# Altium PCB PCB1.PcbDoc
Units mm, origin at the board's own origin, x right, y up, seen from the top; angles counter-clockwise.
Board outline 87.38 x 72.52 mm, 2 copper layers (Top Layer, Bottom Layer); 23 components, 15 nets, 94 pads, 2 vias.
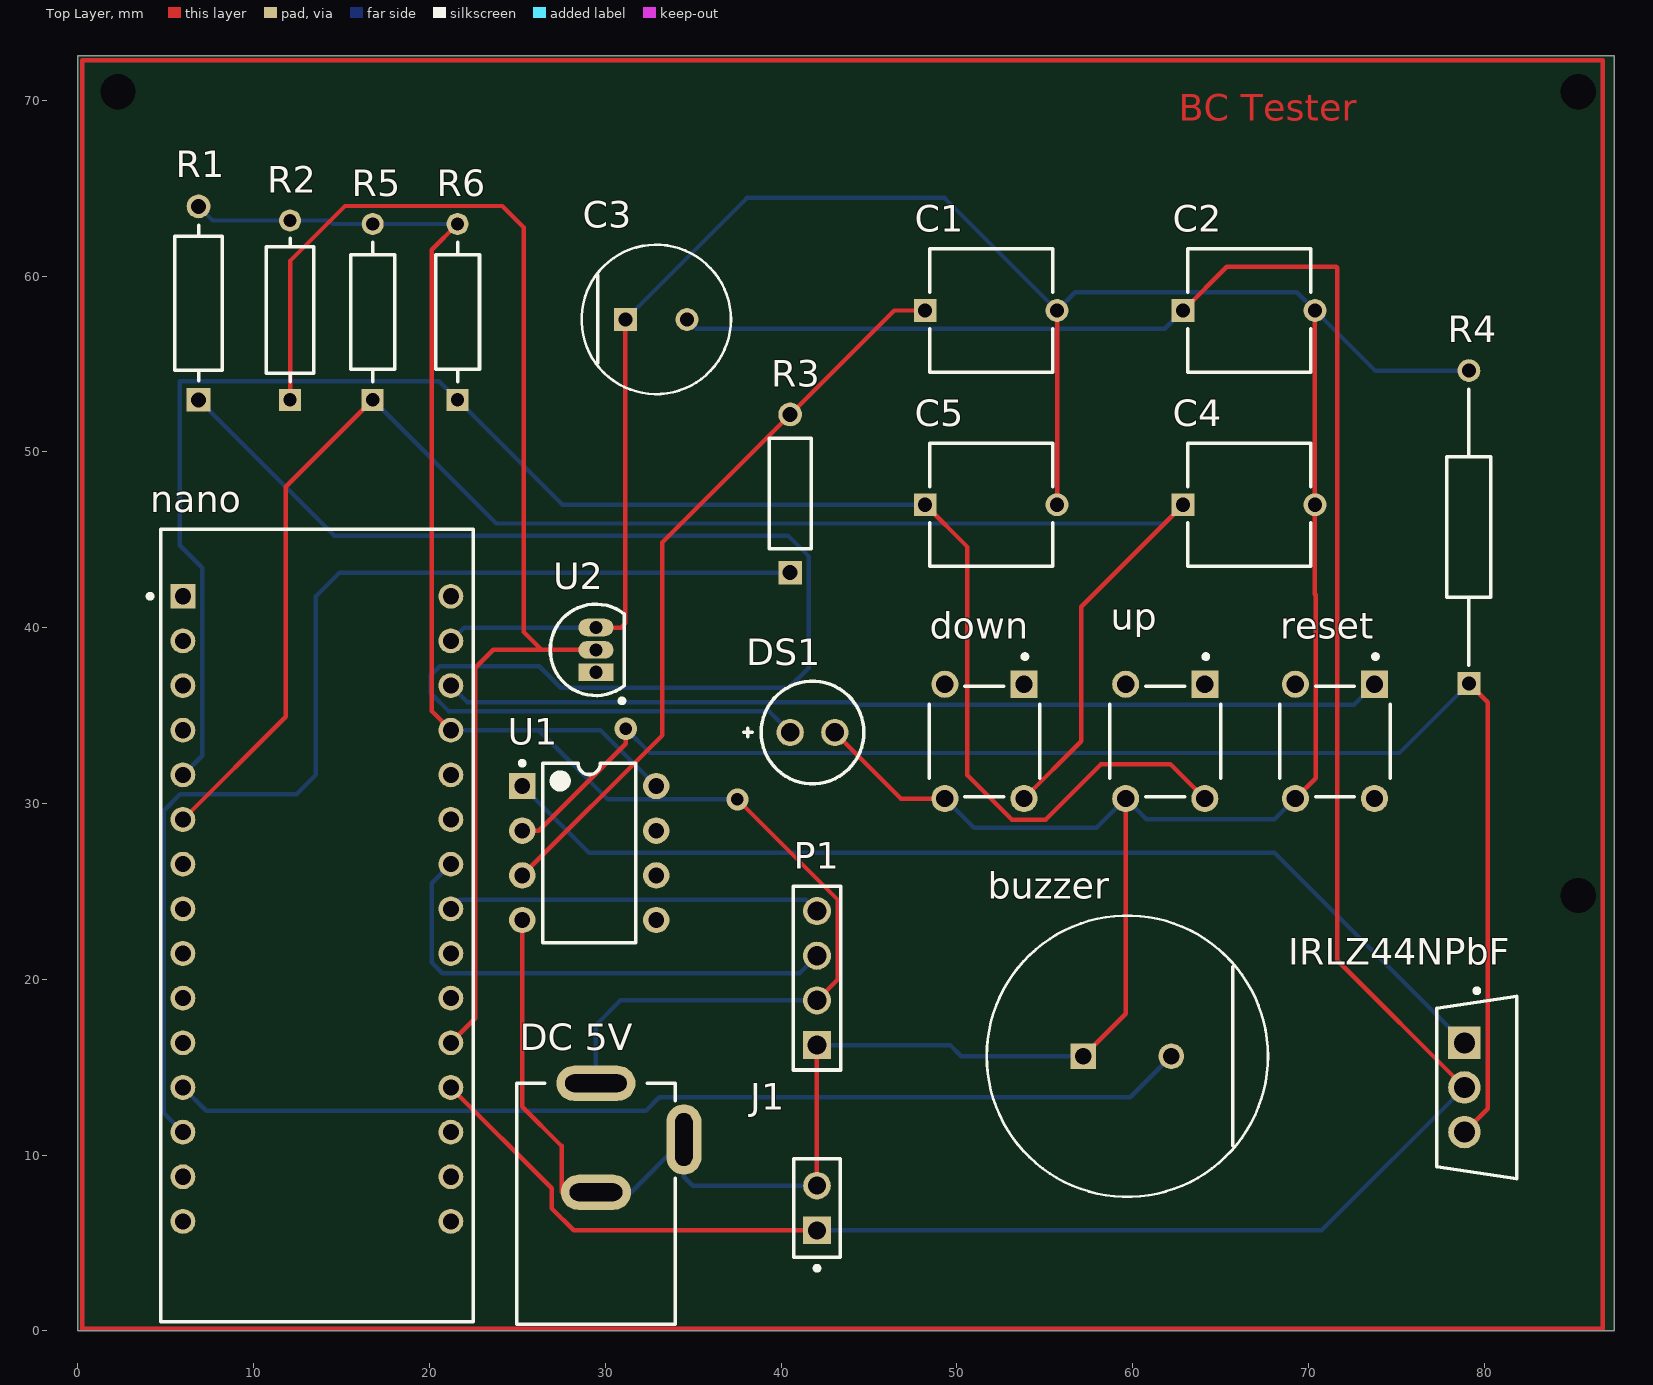
[diagram p0: Top Layer view]
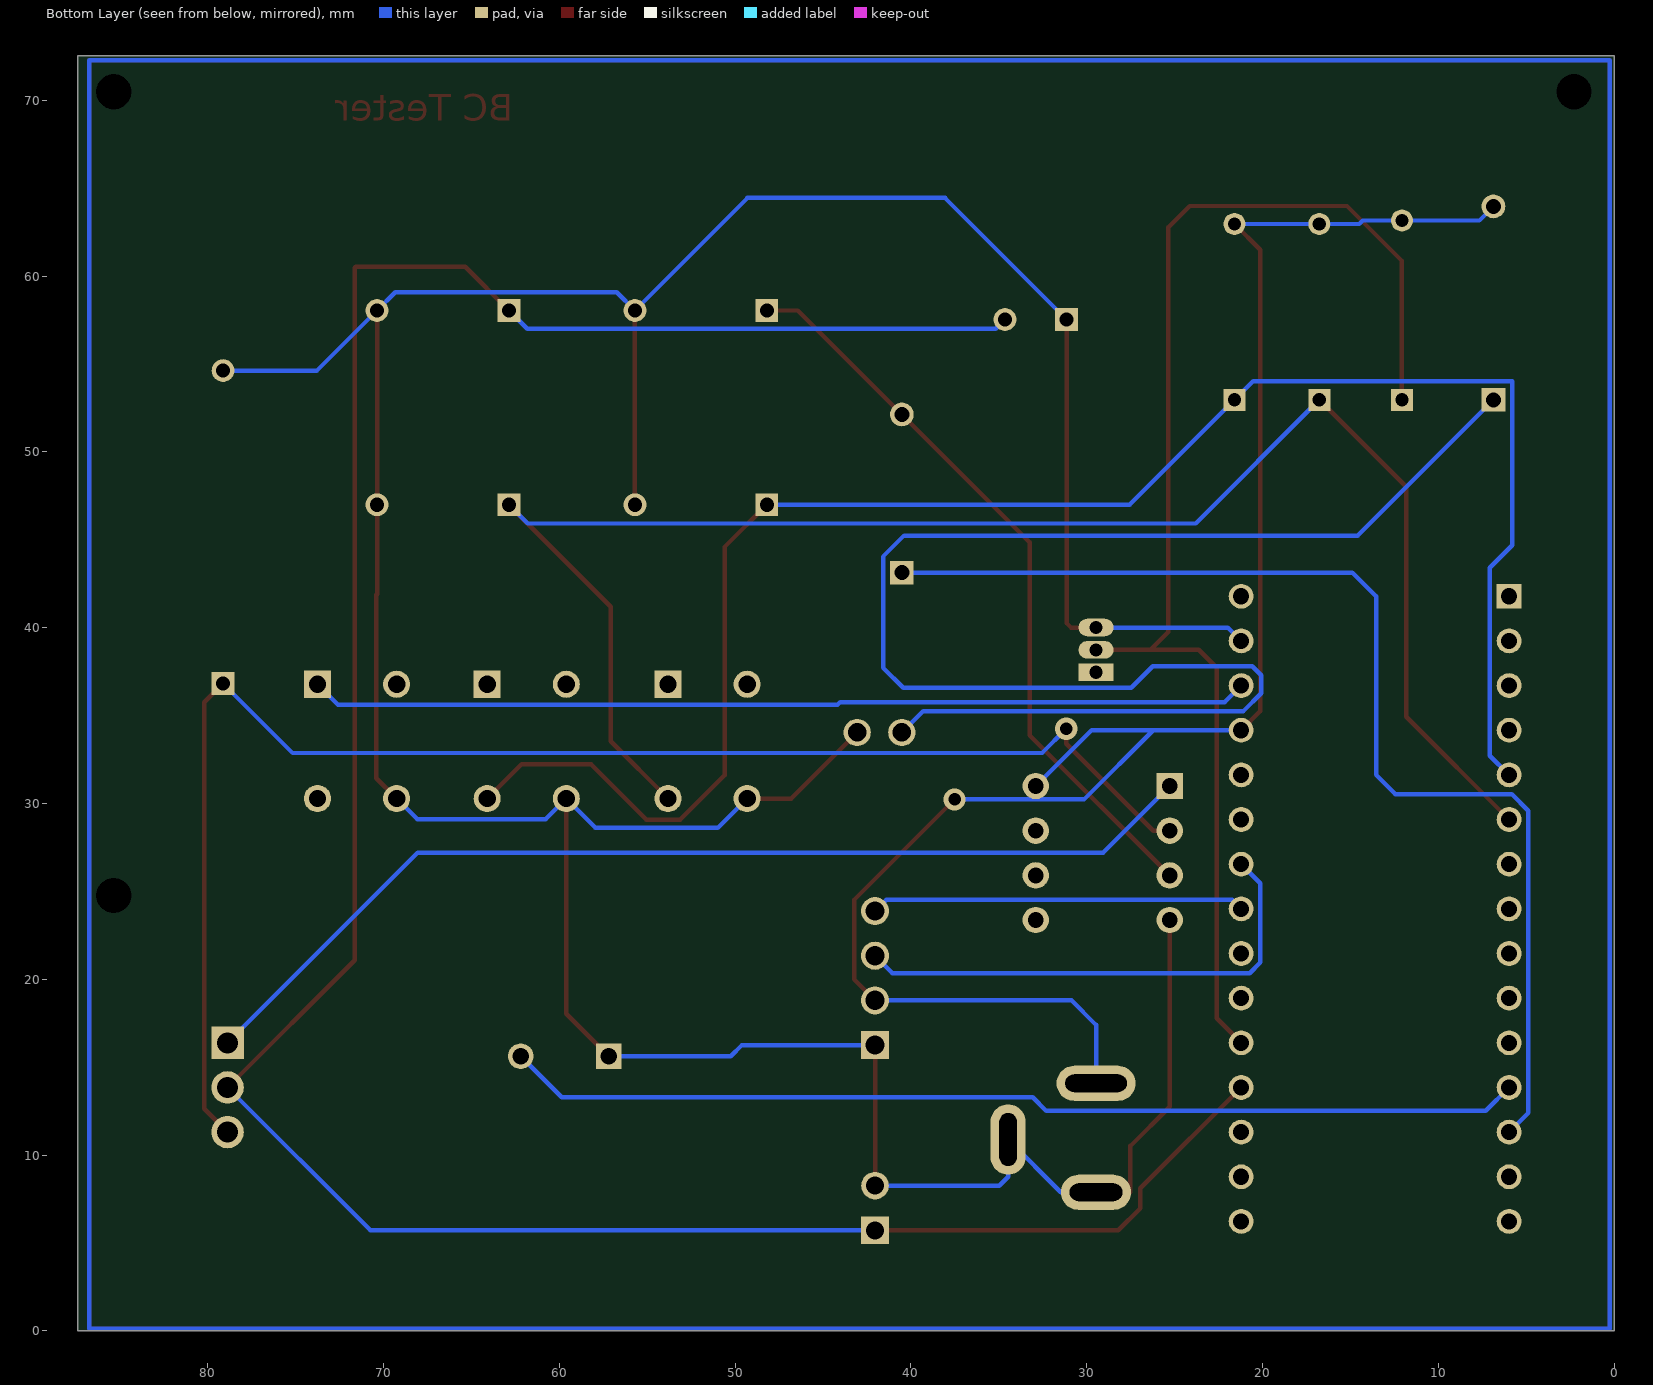
[diagram p1: Bottom Layer view, seen from below]
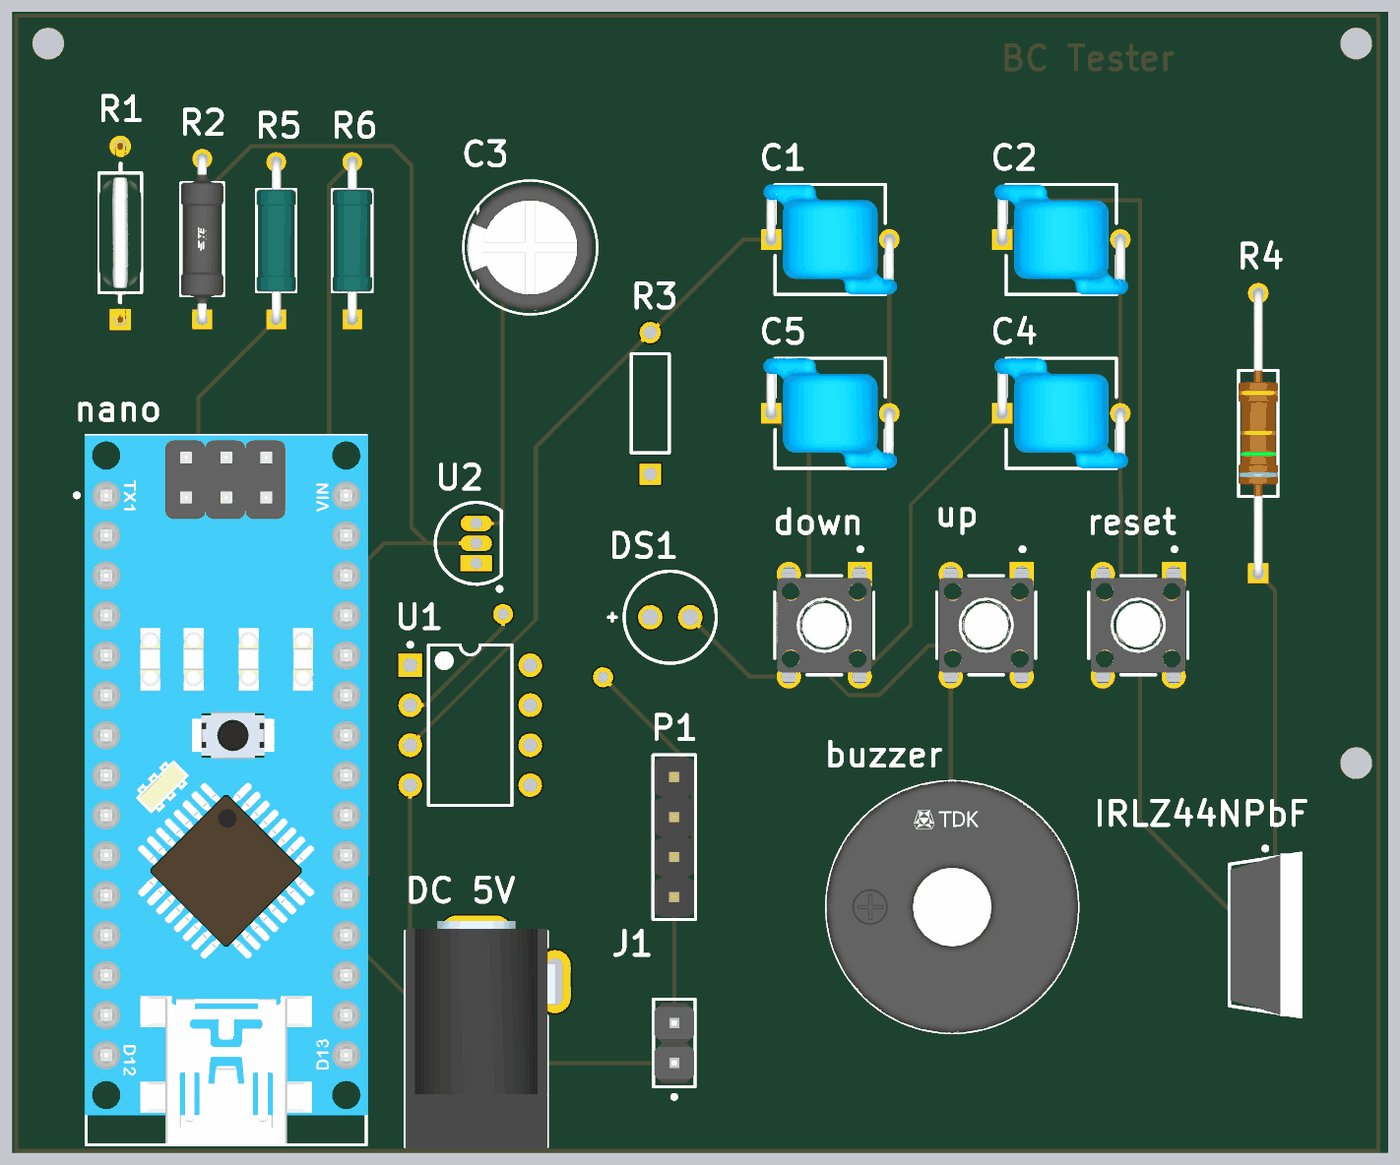
[diagram p2: 3D render of the assembled board from above, using the file's embedded part models]

## Layer stack, top to bottom
Top Solder: solder mask 0.0102, Solder Resist, Dk 3.5
Top Layer: signal copper 0.0356
Dielectric 1: dielectric 0.32, FR-4, Dk 4.8
Bottom Layer: signal copper 0.0356
Bottom Solder: solder mask 0.0102, Solder Resist, Dk 3.5

## Board outline
0,0 87.376,0 87.376,72.517 0,72.517

## Design rules (kind name [scope] priority, off if disabled: settings)
Clearance [All] p1: gap=0.254 ignorepadtopadclearanceinfootprint=FALSE except(0: Arc-Hole Track-Hole SMDPad-Hole THPad-Hole Via-Hole Fill-Hole Poly-Hole Region-Hole Text-Hole)
HoleSize [All] p1: absolutevalues=TRUE maxlimit=3.5 minlimit=0.025 maxpercent=80.000 minpercent=20.000
MinimumSolderMaskSliver [All] p1: minsoldermaskwidth=0.06
PolygonConnect [All] p1: connectstyle=Relief reliefconductorwidth=0.254 reliefentries=4 polygonreliefangle="90 Angle" airgapwidth=0.254
RoutingVias [All] p1: holewidth=0.711 width=1.27 viastyle="Through Hole" minholewidth=0.711 minwidth=1.27 maxholewidth=0.711 maxwidth=1.27
SilkToSolderMaskClearance [IsPad] p1: minsilkscreentomaskgap=0.2 clearancetoexposedcopper=TRUE
SolderMaskExpansion [All] p1: expansion=0.102 istentingtop=FALSE
Width [All] p1: maxlimit=0.254 minlimit=0.254 preferedwidth=0.254
27 further rules are at their usual default settings.

## Components (designator, comment, footprint, x,y, rotation, side; value= is the part's Value field where it differs from the comment)
buzzer "SDC1610M5-01" FP-SDC1610M5-01-MFG 59.69,15.621 r0 top
C1 "100nF" FP-DE6_D7_T7_F7_5_d0_6-0-MFG 51.943,58.039 r0 top
C2 "100nF" FP-DE6_D7_T7_F7_5_d0_6-0-MFG 66.615,58.039 r0 top
C3 "220uF" FP-RAD-TH-D_8_0_5-L_11_5-MFG 32.893,57.531 r0 top
C4 "100nF" FP-DE6_D7_T7_F7_5_d0_6-0-MFG 66.615,46.99 r0 top
C5 "100nF" FP-DE6_D7_T7_F7_5_d0_6-0-MFG 51.943,46.99 r0 top
"DC 5V" "KLDX-0202-B" KYCN-KLDX-0202-B_V 29.464,0.381 r90 top
down "2-1825910-7" FP-2-1825910-7-MFG 51.562,33.528 r0 top
DS1 "HLMP-4740" AVAG-HLMP-4740 41.783,34.036 r0 top
IRLZ44NPbF "IRLZ44NPbF" FP-PG-TO220-3-MFG 79.572,13.843 r0 top
J1 "Battery input" FP-M20-9990246-MFG 42.037,6.985 r90 top
nano "A000005" FP-A000005-MFG 13.589,23.05 r0 top
P1 "61300411121" 61300411121 42.037,20.066 r90 top
R1 "470" FP-RNC55-MFG 6.858,58.459 r90 top value=10kΩ
R2 "33K" FP-H8511KBYA-MFG 12.065,58.059 r90 top
R3 "1M" RESA60-630X240 40.513,47.625 r90 top
R4 "1R" FP-PR01-MFG 79.121,45.72 r90 top
R5 "4.7K" FP-MRS25-MFG 16.764,57.959 r90 top
R6 "4.7K" FP-MRS25-MFG 21.59,57.959 r90 top
reset "2-1825910-7" FP-2-1825910-7-MFG 71.501,33.528 r0 top
U1 "LM358P" P0008A 29.083,27.178 r0 top
U2 "LM385BZ-1.2/NOPB" Z03A 29.464,38.735 r0 top
up "2-1825910-7" FP-2-1825910-7-MFG 61.849,33.528 r0 top

## Footprints (in the part's own frame and the unit in brackets; to place one, negate y for a bottom-side part, rotate by r counter-clockwise, add the part's x,y. Pads: shape width x height; smd on the part's side, far side on the other; paste and mask are expansions set on the pad)
61300411121 [mm] "Pin Header, pitch 2.54 mm, THT, Vertical, single row, 4p"
  rect 1.6x1.6 hole 1.1: 1(-3.81,0)
  round 1.6 hole 1.1: 2(-1.27,0) 3(1.27,0) 4(3.81,0)
  silkscreen extent -5.23,-1.34 5.23,1.34, body extent -5.08,-1.27 5.08,1.27, height 8.57
AVAG-HLMP-4740 [mm] "THD, 2-Leads, Dia 5.845mm, Pitch 2.54mm"
  round 1.55 hole 1.05: 1(-1.27,0) 2(1.27,0)
  silkscreen extent -3.92,-2.92 2.92,2.92
FP-2-1825910-7-MFG [mm]
  rect 1.54x1.54 hole 0.99 paste-1000 mask+0: 1(2.25,3.25)
  round 1.54 hole 0.99 paste-1000 mask+0: 2(2.25,-3.25) 3(-2.25,3.25) 4(-2.25,-3.25)
  silkscreen extent -3.14,-3.14 3.14,4.95, body extent -3.24,-4.12 3.24,4.12, height 0.25
FP-A000005-MFG [mil]
  rect 55.67x55.67 hole 35.98 paste-39370.1 mask+0: 1(-300,737.5)
  round 55.67 hole 35.98 paste-39370.1 mask+0: 2(-300,637.5) 3(-300,537.5) 4(-300,437.5) 5(-300,337.5) 6(-300,237.5) 7(-300,137.5) 8(-300,37.5) 9(-300,-62.5) 10(-300,-162.5) 11(-300,-262.5) 12(-300,-362.5) 13(-300,-462.5) 14(-300,-562.5) 15(-300,-662.5) 16(300,-662.5) 17(300,-562.5) 18(300,-462.5) 19(300,-362.5) 20(300,-262.5) 21(300,-162.5) 22(300,-62.5) 23(300,37.5) 24(300,137.5) 25(300,237.5) 26(300,337.5) 27(300,437.5) 28(300,537.5) 29(300,637.5) 30(300,737.5)
  silkscreen extent -379,-888 350,888, body extent -354,-891 354,891, height 10
FP-DE6_D7_T7_F7_5_d0_6-0-MFG [mm]
  rect 1.3x1.3 hole 0.8 paste-1000 mask+0: 1(-3.75,0)
  round 1.3 hole 0.8 paste-1000 mask+0: 2(3.75,0)
  silkscreen extent -3.5,-3.5 3.5,3.5, body extent -4.5,-3.6 4.5,3.6, height 0.25
FP-H8511KBYA-MFG [mm]
  rect 1.25x1.25 hole 0.75 paste-1000 mask+0: 1(-5.1,0)
  round 1.25 hole 0.75 paste-1000 mask+0: 2(5.1,0)
  silkscreen extent -4.08,-1.35 4.07,1.35, body extent -5.82,-1.45 5.82,1.45, height 0.25
FP-M20-9990246-MFG [mm]
  rect 1.57x1.57 hole 1.02 paste-1000 mask+0: 1(-1.27,0)
  round 1.57 hole 1.02 paste-1000 mask+0: 2(1.27,0)
  silkscreen extent -3.55,-1.32 2.79,1.32, body extent -2.89,-1.42 2.89,1.42, height 0.25
FP-MRS25-MFG [mm]
  rect 1.25x1.25 hole 0.75 paste-1000 mask+0: 1(-5,0)
  round 1.25 hole 0.75 paste-1000 mask+0: 2(5,0)
  silkscreen extent -3.98,-1.25 3.97,1.25, body extent -5.72,-1.35 5.72,1.35, height 0.25
FP-PG-TO220-3-MFG [mm]
  rect 1.85x1.85 hole 1.2 paste-1000 mask+0: 1(-0.705,2.54)
  round 1.85 hole 1.2 paste-1000 mask+0: 2(-0.705,0) 3(-0.705,-2.54)
  silkscreen extent -2.27,-5.2 2.27,5.62, body extent -2.37,-5.55 2.37,5.55, height 0.25
FP-PR01-MFG [mm]
  rect 1.3x1.3 hole 0.8 paste-1000 mask+0: 1(-8.9,0)
  round 1.3 hole 0.8 paste-1000 mask+0: 2(8.9,0)
  silkscreen extent -7.85,-1.25 7.85,1.25, body extent -9.65,-1.35 9.65,1.35, height 0.25
FP-RAD-TH-D_8_0_5-L_11_5-MFG [mm]
  rect 1.3x1.3 hole 0.8 paste-1000 mask+0: 1(-1.75,0)
  round 1.3 hole 0.8 paste-1000 mask+0: 2(1.75,0)
  silkscreen extent -4.25,-4.25 4.25,4.25, body extent -4.35,-4.35 4.35,4.35, height 0.25
FP-RNC55-MFG [mm]
  rect 1.35x1.35 hole 0.85 paste-1000 mask+0: 1(-5.5,0)
  round 1.35 hole 0.85 paste-1000 mask+0: 2(5.5,0)
  silkscreen extent -4.43,-1.34 4.43,1.34, body extent -6.27,-1.45 6.27,1.45, height 0.25
FP-SDC1610M5-01-MFG [mm]
  rect 1.45x1.45 hole 0.95 paste-1000 mask+0: 1(-2.5,0)
  round 1.45 hole 0.95 paste-1000 mask+0: 2(2.5,0)
  silkscreen extent -8,-8 8,8, body extent -8.1,-8.1 8.1,8.1, height 0.25
KYCN-KLDX-0202-B_V [mm] "3 Conductor Jack, 9 x 14.5 mm Body"
  oval 2x4.5 hole 1 slot 3.5 at 90 deg: 1(13.7,0)
  oval 2x4 hole 1 slot 3 at 90 deg: 2(7.5,0)
  oval 4x2 hole 1 slot 3 at 0 deg: 3(10.5,-5)
  silkscreen extent 0,-4.5 13.7,4.5, body extent -0.15,-5 14.35,4.5, height 11
P0008A [mm] "DIP, 8-Leads, Body 10.15x6.6mm, Pitch 2.54mm"
  rect 1.5x1.5 hole 0.9: 1(-3.81,3.81)
  round 1.5 hole 0.9: 2(-3.81,1.27) 3(-3.81,-1.27) 4(-3.81,-3.81) 5(3.81,-3.81) 6(3.81,-1.27) 7(3.81,1.27) 8(3.81,3.81)
  silkscreen extent -3.93,-5.1 2.65,5.23, body extent -3.95,-5.07 3.95,5.07, height 5.08
RESA60-630X240 [mm] "Axial Resistor, 2-Leads, Dia 2.4mm, Body Length 6.3mm"
  rect 1.35x1.35 hole 0.85: 1(-4.5,0)
  round 1.35 hole 0.85: 2(4.5,0)
  silkscreen extent -3.15,-1.2 3.15,1.2, body extent -3.15,-1.2 3.15,1.2, height 2.4
Z03A [mm] "TO, Flat Index; 3 In-Line, Axial Leads; Body Dia. 5mm; Leads 0.55 x 0.50 mm (max)"
  rect 2x1 hole 0.75: 1(0,-1.27)
  oval 2x1 hole 0.75: 2(0,0) 3(0,1.27)
  silkscreen extent -2.6,-3.02 1.61,2.6, body extent -2.6,-2.61 1.6,2.61, height 5.2

## Part data
buzzer: library part CMP-08413-000008-1, "AUDIO MAGNETIC INDICATOR 4-8V TH", Frequency=2.4kHz, Max Operating Temperature=70°C, Max Supply Current=30mA, Min Operating Temperature=-10°C, Nominal Supply Voltage (DC)=5V, Diameter=16mm, Height=10mm, Input Type=DC, Lead Free="Lead Free", Mount="Through Hole", Number of Pins=2, Number of Terminals/Pins=2, Operating Supply Current=30mA, Packaging=Tray, Sensing Method=Magnetic, Series=SDC, Termination="PC Pins", Voltage Rating=5V
C1 C2 C4 C5: library part CMP-06035-062244-1, "CAP CER 1000PF 300VAC RADIAL", Capacitance=1nF, Case/Package=Radial, Max Operating Temperature=125°C, Min Operating Temperature=-25°C, Package Quantity=700, Ratings=AEC-Q200, Resistor Type=Ceramic, Tolerance=20%, Voltage Rating (AC)=300V, Depth=7mm, Height - Seated (Max)=0.394inch, Lead Diameter=0.6mm, Lead Pitch=7.5mm, Lead/Base Style="Formed Leads", Material=Ceramic, Mount="Through Hole", Packaging=Bulk, REACH SVHC="No SVHC", RoHS Compliant=Yes, Series=KJ, Termination=Radial, Width=7mm
C3: library part CMP-05427-001200-1, "Aluminum Electrolytic Capacitors (Radial Lead Type) AEC-Q200 Qualified 220uF ±20% 25V", Case/Package=Radial, Max Operating Temperature=105°C, Min Operating Temperature=-55°C, Package Quantity=200, Ripple Current=230mA, Tolerance=20%, Voltage=25V, Capacitance=220uF, Construction=RADIAL, Contact Plating=Tin, Diameter=8mm, Height=11.5mm, Height - Seated (Max)=0.512inch, Lead Diameter=0.6mm, Lead Pitch=3.5mm, Lead/Base Style=Straight, Length=11.5mm, Life (Hours)=1000Hour, Mount="Through Hole", Number of Pins=2, Packaging=Bulk, Polarity=Polar, REACH SVHC="No SVHC", Ripple Current (AC)=230mA, RoHS Compliant=Yes, Series=HD, Termination=Radial, Voltage Rating=25V, Voltage Rating (DC)=25V
"DC 5V": library part CMP-0256-00001-1, "3 Conductor Power Jack, 2 break 2 aux contacts", ComponentLink1Description="Manufacturer URL", ComponentLink1URL=http://kycon.com/, ComponentLink2Description=Datasheet, ComponentLink2URL=http://anacapa.kycon.com/Catalog_PDF/KLDX_0202.pdf, Contact Finish=Brass, Mounting Technology="Through Hole", PackageDescription="Jack, 9 x 14.5 mm Body, 2.5 mm Center Pin Diameter", PackageReference=KLDX-0202-B, PartNumber=KLDX-0202-B
down reset up: library part CMP-03402-000004-1, "SWITCH TACTILE SPST-NO 0.05A 24V", Contact Current Rating=50mA, Contact Resistance=100mΩ, Manufacturer="TE Connectivity", Operating Force=160gf, Temperature="-35°C to +85°C", Temperature Range High=+85°C, Temperature Range Low=-35°C, Voltage Rating Dc=24V, Automotive=No, Category=Switch, ComponentLink2Description=Datasheet, ComponentLink2URL=https://www.te.com/commerce/DocumentDelivery/DDEController?Action=showdoc&DocId=Customer+Drawing%7F1825910%7FC10%7Fpdf%7FEnglish%7FENG_CD_1825910_C10.pdf%7F2-1825910-7, Device Class L1=Electromechanical, Device Class L2=Switches, Device Class L3="Pushbutton Switches", Digikey Description="SWITCH TACTILE SPST-NO 0.05A 24V", Electromechanical Life=100000Cycles, Height=13.3mm, Lead Free=Yes, Manufacturer Part Number=2-1825910-7, Mount="Through Hole", Mouser Description="Switch Tactile OFF (ON) SPST Extended Round Button PC Pins 0.05A 24VDC 100000Cycles 1.57N Thru-Hole Loose", Octopart=https://octopart.com/2-1825910-7-te+connectivity-42270510, Package=2-1825910-7, RoHS=TRUE, Throw Configuration=SPST-NO
DS1: library part CMP-2000-06413-1, "T-1 3/4 (5 mm) Low Current LED Lamp, Green, 1.9 V, -20 to 100 degC, 2-Pin THD, RoHS, Bulk", Color=Green, Dominant Wavelength/Color Temperature=569nm, Manufacturer=AvagoTechnologies, Package=2T-13/4, Package Description="2-Pin Through Hole Device, Dia 5.845 mm, Pitch 2.54 mm", Category=LEDs, ComponentLink1Description="New link", Datasheet URL=http://docs.avagotech.com/docs/AV02-1557EN, Datasheet Version=07/2014, Intensity=2.3mcd, Lens Appearance=ColoredDiffused, Lens Shape Type=Circular, Manufacturer URL=http://www.avagotech.com/, Mounting=ThroughHole, Mounting Orientation=TopMount, Mounting Technology=ThroughHole, Number of LEDs=1, Package Reference=HLMP-4740, Packaging=Bulk, Peak Wavelength=565nm, Pin Count=2, Rad Hard=No, Type=Uni-Color, Viewing Angle=50°
IRLZ44NPbF: library part CMP-32901-000488-1, "MOSFET N-CH 55V 47A TO220AB", Case/Package=TO-220, Continuous Drain Current (ID)=47A, Drain to Source Breakdown Voltage=55V, Drain to Source Resistance=35mR, Gate to Source Voltage (Vgs)=16V, Input Capacitance=1.7nF, Max Operating Temperature=175°C, Max Power Dissipation=110W, Min Operating Temperature=-55°C, Threshold Voltage=2V, Drain to Source Voltage (Vdss)=55V, Element Configuration=Single, Halogen Free="Halogen Free", Height=0.6inch, Lead Free="Lead Free", Length=0.414inch, Max Dual Supply Voltage=55V, Mount="Through Hole", Number of Pins=3, Packaging=Rail/Tube, Power Dissipation=110W, Rds On Max=22mR, REACH SVHC="No SVHC", RoHS Compliant=Yes, Turn-Off Delay Time=26ns, Turn-On Delay Time=11ns, Width=0.185inch
J1: library part CMP-15831-000009-1, "CONN HEADER VERT 2POS 2.54MM", Current Rating=3A, Manufacturer=Harwin, Manufacturer Part Number=M20-9990246, Temperature="-40°C to +105°C", Temperature Range High=+105°C, Temperature Range Low=-40°C, Automotive=No, Category=Conn, ComponentLink2Description=Datasheet, ComponentLink2URL=https://cdn.harwin.com/pdfs/M20-999.pdf, Conn Gender=Male, Conn Orientation=Vertical, Contact Material=Tin,Nickel, Device Class L1=Connectors, Device Class L2="Headers and Wire Housings", Device Class L3=unset, Digikey Description="CONN HEADER VERT 2POS 2.54MM", Height=8.99mm, Lead Free=Yes, Mouser Description="2.54mm (0.1\") Pitch SIL Vertical PC Tail Pin Header, 6.1mm mating pin height, tin, 2 contacts", Number Of Contacts=2, Number Of Rows=1, Octopart=https://octopart.com/m20-9990246-harwin-2590635, Package=M20-9990246, Pitch=2.54mm, RoHS=TRUE
nano: library part CMP-189986-000002-1, "ARDUINO NANO ATMEGA328 EVAL BRD", Operating Supply Voltage=12V, Package Quantity=50, Core Architecture=AVR, Data Bus Width=8b, Evaluation Kit=Yes, Height=0.25inch, Interface=I2C, Length=7inch, Number of Bits=8, Packaging=Bulk, REACH SVHC="No SVHC", Series="AVR® ATmega", Weight=0.358383oz, Width=5inch
P1: library part CMP-1502-01064-1, "THT Vertical Pin Header WR-PHD, Pitch 2.54 mm, Single Row, 4 pins", Contact Resistance=20mOhm, Manufacturer="Wurth Elektronik", Operating Temperature=-40to105degC, Rated Current=3A, Withstanding Voltage=500VAC, Working Voltage=250VAC, Datasheet URL=https://katalog.we-online.de/em/datasheet/6130xx11121.pdf, Gender=Male, Manufacturer URL=http://www.we-online.de, Mounting Technology=THT, Orientation=Vertical, Package Reference=61300411121, Packaging=Bag, Part Number=61300411121, Pin Number=4, Pitch=2.54mm, Publisher=WurthElektronik, Row Number=Single
R1: library part CMP-02408-000004-1, "RES 10K OHM 1/8W 1% AXIAL", Manufacturer=Vishay, Manufacturer Part Number=RNC55H1002FSB14, Package=RNC55, Power Rating=0.125W, Resistance=10kΩ, Temperature="-65°C to +175°C", Temperature Coefficient=50ppm/°C, Temperature Range High=+175°C, Temperature Range Low=-65°C, Tolerance=1%, Voltage Rating=200V, Automotive=No, Category=Res, ComponentLink2Description=Datasheet, ComponentLink2URL=https://www.vishay.com/docs/31025/erc.pdf, Composition="Metal Film", Device Class L1="Passive Components", Device Class L2=Resistors, Device Class L3="Through-Hole Resistors", Digikey Description="RES 10K OHM 1/8W 1% AXIAL", Failure Rate=0.001%, Height=2.69mm, Ipc Land Pattern Name=RESAD1100W85L762D269, Lead Free=No, Military Standard=true, Octopart=https://octopart.com/rnc55h1002fs-vishay-40848808, RoHS=FALSE, Series=RNC
R2: library part CMP-03212-000010-1, "RES 511K OHM 0.1% 1/4W AXIAL", Case/Package=Axial, Max Operating Temperature=155°C, Max Power Dissipation=250mW, Min Operating Temperature=-55°C, Number of Resistors=1, Package Quantity=250, Resistance=511kR, Resistance Tolerance=0.1%, Resistor Type="Thin Film", Temperature Coefficient=15ppm/°C, Voltage Rating=350V, Diameter=2.5mm, ELV=Compliant, Lead Diameter=0.6mm, Lead Length=30mm, Lead/Base Style=Axial, Length=7.2mm, Mount=Axial, Number of Terminations=2, Packaging=Bulk, Power Rating=250mW, REACH SVHC="No SVHC", RoHS Compliant=Yes, Series="Holco, Holsworthy", Technology="METAL FILM", Termination=Axial, Tolerance=0.1%, Voltage Rating (DC)=350V, Weight=0.008466oz
R3: library part CMP-1659-00070-1, "Axial Resistor, 1 MOhm, +/- 1%, 250 mW, -55 to 155 degC, 2-Pin THD, RoHS, Bulk", Case\Package=Axial, Max Operating Temperature="155 degC", Min Operating Temperature="-55 degC", Package Quantity=200, Power Rating="250 mW", Resistance="47.5 kohm", Tolerance=1%, Voltage Rating="250 V", ComponentLink1Description="Manufacturer URL", ComponentLink1URL=http://www.yageo.com/, ComponentLink2Description=Datasheet, ComponentLink2URL=http://www.yageo.com/documents/recent/Yageo%20LR_MFR_2013.pdf, DatasheetVersion=Apr-13, Length="0.248 inch", Mount="Through Hole", PackageDescription="2-Pin Axial Lead, Dia 2.4 mm, Body Length 6.3 mm", PackageReference=MFR-25, Packaging=Bulk, RoHSCompliant=true
R4: library part CMP-02408-000029-1, "RES 75K OHM 1W 5% AXIAL", Case/Package=Axial, Max Operating Temperature=155°C, Max Power Dissipation=1W, Min Operating Temperature=-55°C, Operating Supply Voltage=350V, Package Quantity=5000, Resistance=75kR, Resistance Tolerance=5%, Resistor Type="Metal Film", Temperature Coefficient=250ppm/°C, Diameter=2.5mm, Features="Flame Retardant Coating", Lead Diameter=0.58mm, Lead Free="Lead Free", Length=0.256inch, Number of Pins=2, Number of Terminations=2, Packaging="Tape and Reel", Power Rating=1W, RoHS Compliant=Yes, Series=PR01, Technology="METAL FILM", Termination=Axial, Tolerance=5%, Voltage Rating=350V, Voltage Rating (DC)=350V, Width=2.5mm
R5 R6: library part CMP-02408-000051-1, "RES 1K OHM 0.6W 1% AXIAL", Case/Package=Axial, Max Operating Temperature=155°C, Max Power Dissipation=600mW, Min Operating Temperature=-55°C, Package Quantity=5000, Resistance=1kR, Resistance Tolerance=1%, Resistor Type="Metal Film", Temperature Coefficient=50ppm/°C, Voltage Rating=350V, Construction=Cylindrical, Contact Plating=Tin, Diameter=2.5mm, Lead Diameter=0.6mm, Lead Free="Lead Free", Length=6.5mm, Military Standard=Not, Mount="Through Hole", Number of Pins=2, Number of Terminations=2, Packaging="Tape and Reel", Power Rating=600mW, Radiation Hardening=No, RoHS Compliant=Yes, Series=MRS25, Technology="THIN FILM", Termination=Axial, Tolerance=1%, Voltage Rating (DC)=350V, Weight=0.00776oz, Width=2.5mm
U1: library part CMP-2000-06549-1, "Dual Operational Amplifier, 3 to 32 V, 0 to 70 degC, 8-Pin PDIP (P), RoHS, Tape and Reel", Manufacturer="Technik Industrial", Package Description="8-Pin Double In-line Package, Body 9.59 x 6.35 mm, Pitch 2.54 mm", Package Reference=P8, Datasheet URL=http://www.ti.com/lit/ds/symlink/lm358.pdf, Datasheet Version="Rev. T, 04/2015", Manufacturer URL=http://www.technik.com.hk/, Mounting Technology=ThroughHole, Package URL=http://www.ti.com/lit/ml/mpdi001b/mpdi001b.pdf
U2: library part CMP-0074-00028-2, "Micropower Voltage Reference Diode, 3-pin TO-92, Pb-Free", Manufacturer="National Semiconductor", PackageTopMarking=NSXYTT*LM385*BZ1.2, PowerWise=N, Code_JEDEC=TO-226-AA, ComponentLink1Description="LM385-1.2 Datasheet", ComponentLink1URL=http://www.national.com/ds/LM/LM385-1.2.pdf, ComponentLink2Description="LM385-1.2 Web Page", ComponentLink2URL=http://www.national.com/pf/LM/LM385-1.2.html, ComponentLink3Description="Z03A Package Page", ComponentLink3URL=http://www.national.com/packaging/folders/z03a.html, CompType="Voltage Reference IC", DatasheetVersion=Jan-2008, PackageDescription="TO-92, Molded, 3 Lead", PackageReference=Z03A, PackageVersion="revG, Sep-2000", PinCount=3, RevisionNote="Component URLs added", RoHS=Y

## Free pads (board coordinates)
  round 1.524 hole 2: 7(2.286,70.485) 8(85.344,70.485) 9(85.344,24.765)

## Via types
v1: diameter 1.27, hole 0.711, Top Layer to Bottom Layer, 2 vias

## Nets (pads, with @x,y where several pads share a name; then routed paths per layer and width w, separated by ;. In a path a pad name is that pad's centre, name@x,y a point inside that pad or via, vN(x,y) a via of type N, cw(c..) or ccw(c..) an arc to the next point about the centre after c; other vN are vias at no path point)
+5: "DC 5V.1" nano.27 P1.2 R1.2 R2.2 R5.2 R6.2 U1.8 | length 101.7
  Top Layer w0.254: nano.27 20.117,35.255 20.117,61.486 R6.2 ; v1(37.516,30.226) 43.231,24.511 43.231,19.99 P1.2
  Bottom Layer w0.254: R1.2 7.658,63.159 R2.2 14.3,63.159 14.5,62.959 R5.2 R6.2 ; nano.27 26.213,34.163 ; 29.464,14.081 29.464,17.399 30.861,18.796 P1.2 ; U1.8 29.718,34.163 26.213,34.163 ; v1(37.516,30.226) 30.15,30.226 26.213,34.163
A0: C2.1 C3.2 IRLZ44NPbF.2 J1.1 nano.19 | length 153.4
  Top Layer w0.254: nano.19 26.949,8.103 26.949,6.96 28.194,5.715 J1.1 ; C2.1 65.354,60.528 71.577,60.528 71.628,60.477 71.628,21.082 IRLZ44NPbF.2
  Bottom Layer w0.254: C3.2 35.176,56.998 61.824,56.998 C2.1 ; J1.1 70.739,5.715 IRLZ44NPbF.2
A1: nano.20 R2.1 U2.2 | length 76.6
  Top Layer w0.254: R2.1 12.065,60.858 15.189,63.983 24.13,63.983 25.349,62.763 25.349,39.751 26.365,38.735 ; nano.20 22.606,17.78 22.606,37.719 23.622,38.735 26.365,38.735 ; U2.2 26.365,38.735
A4: nano.23 P1.4 | length 21.3
  Bottom Layer w0.254: nano.23 21.717,24.511 41.402,24.511 P1.4
A5: nano.24 P1.3 | length 28.6
  Bottom Layer w0.254: nano.24 20.117,25.451 20.117,20.955 20.726,20.345 41.046,20.345 P1.3
BUZZER: buzzer.2 nano.12 | length 58.1
  Bottom Layer w0.254: nano.12 7.29,12.522 32.309,12.522 33.071,13.284 59.853,13.284 buzzer.2
DOWN: C4.1 down.2 nano.6 R5.1 | length 98.3
  Top Layer w0.254: nano.6 11.811,34.925 11.811,48.006 R5.1 ; down.2 57.062,33.528 57.062,41.187 C4.1
  Bottom Layer w0.254: R5.1 23.8,45.923 61.798,45.923 C4.1
GND: "DC 5V.2" "DC 5V.3" buzzer.1 C1.2 C2.2 C3.1 C4.2 C5.2 down.4 DS1.2 J1.2 nano.29 P1.1 R4.2 reset.4 U1.4 U2.3 up.4 | length 226.4
  Top Layer w0.254: U1.4 25.273,12.751 27.508,10.516 27.508,7.881 29.464,7.881 ; U2.3 30.889,40.005 31.143,40.259 C3.1 ; J1.2 P1.1 ; DS1.2 46.811,30.278 down.4 ; C5.2 C1.2 ; buzzer.1 59.599,18.03 up.4 ; reset.4 70.409,31.436 70.409,41.859 70.365,41.903 C4.2 C2.2
  Bottom Layer w0.254: nano.29 21.971,40.005 U2.3 ; 29.464,7.881 31.464,7.881 34.464,10.881 34.464,8.763 34.972,8.255 J1.2 ; C3.1 38.052,64.44 49.292,64.44 C1.2 56.734,59.08 69.324,59.08 C2.2 73.784,54.62 R4.2 ; P1.1 49.606,16.256 50.241,15.621 buzzer.1 ; down.4 50.971,28.619 57.94,28.619 up.4 60.769,29.108 68.081,29.108 reset.4
NetC1_1: C1.1 R3.2 U1.3 | length 42.7
  Top Layer w0.254: U1.3 33.249,33.884 33.249,44.861 R3.2 46.427,58.039 C1.1
NetDS1_1: DS1.1 R1.1 | length 89.8
  Bottom Layer w0.254: R1.1 14.58,45.237 40.386,45.237 41.58,44.044 41.58,37.719 40.437,36.576 27.457,36.576 26.238,37.795 20.574,37.795 20.066,37.287 20.066,36.271 21.082,35.255 39.294,35.255 DS1.1
NetIRLZ44NPbF_1: IRLZ44NPbF.1 U1.1 | length 59.6
  Bottom Layer w0.254: U1.1 29.058,27.203 68.047,27.203 IRLZ44NPbF.1
NetIRLZ44NPbF_3: IRLZ44NPbF.3 R4.1 U1.2 | length 85.4
  Top Layer w0.254: U1.2 26.213,28.448 31.166,33.401 v1(31.166,34.239) ; IRLZ44NPbF.3 80.188,12.624 80.188,35.753 R4.1
  Bottom Layer w0.254: v1(31.166,34.239) 32.537,32.868 75.169,32.868 R4.1
"PWM PIN": nano.13 R3.1 | length 65.9
  Bottom Layer w0.254: nano.13 4.877,12.395 4.877,29.591 5.817,30.531 12.446,30.531 13.538,31.623 13.538,41.783 14.88,43.125 R3.1
RESET: nano.28 reset.1 | length 53.5
  Bottom Layer w0.254: nano.28 22.149,35.763 44.018,35.763 44.171,35.611 72.584,35.611 reset.1
UP: C5.1 nano.5 R6.1 up.2 | length 101.7
  Top Layer w0.254: C5.1 50.597,44.586 50.597,31.598 53.111,29.083 55.042,29.083 58.191,32.233 62.144,32.233 up.2
  Bottom Layer w0.254: nano.5 7.061,32.715 7.061,43.409 5.791,44.679 5.791,54.026 20.523,54.026 R6.1 27.559,46.99 C5.1
pads on no net: down.1 down.3 nano.1 nano.2 nano.3 nano.4 nano.7 nano.8 nano.9 nano.10 nano.11 nano.14 nano.15 nano.16 nano.17 nano.18 nano.21 nano.22 nano.25 nano.26 nano.30 reset.2 reset.3 U1.5 U1.6 U1.7 U2.1 up.1 up.3

## Other copper
Top Layer:
  text "BC Tester" at 62.611,68.834 h1.52
Multi-Layer:
  lines w0.254: 0.254,0.127 86.741,0.127 86.741,72.009 86.741,72.263 86.487,72.263 0.508,72.263 0.254,72.263 0.254,72.009 0.254,0.127